# Altium PCB RT5621 Main V3.3.PcbDoc (part 1 of 2)
Units mm, origin at the board's own origin, x right, y up, seen from the top; angles counter-clockwise.
Board outline 104 x 70 mm, 2 copper layers (Top Layer, Bottom Layer); 129 components, 94 nets, 375 pads, 418 vias.
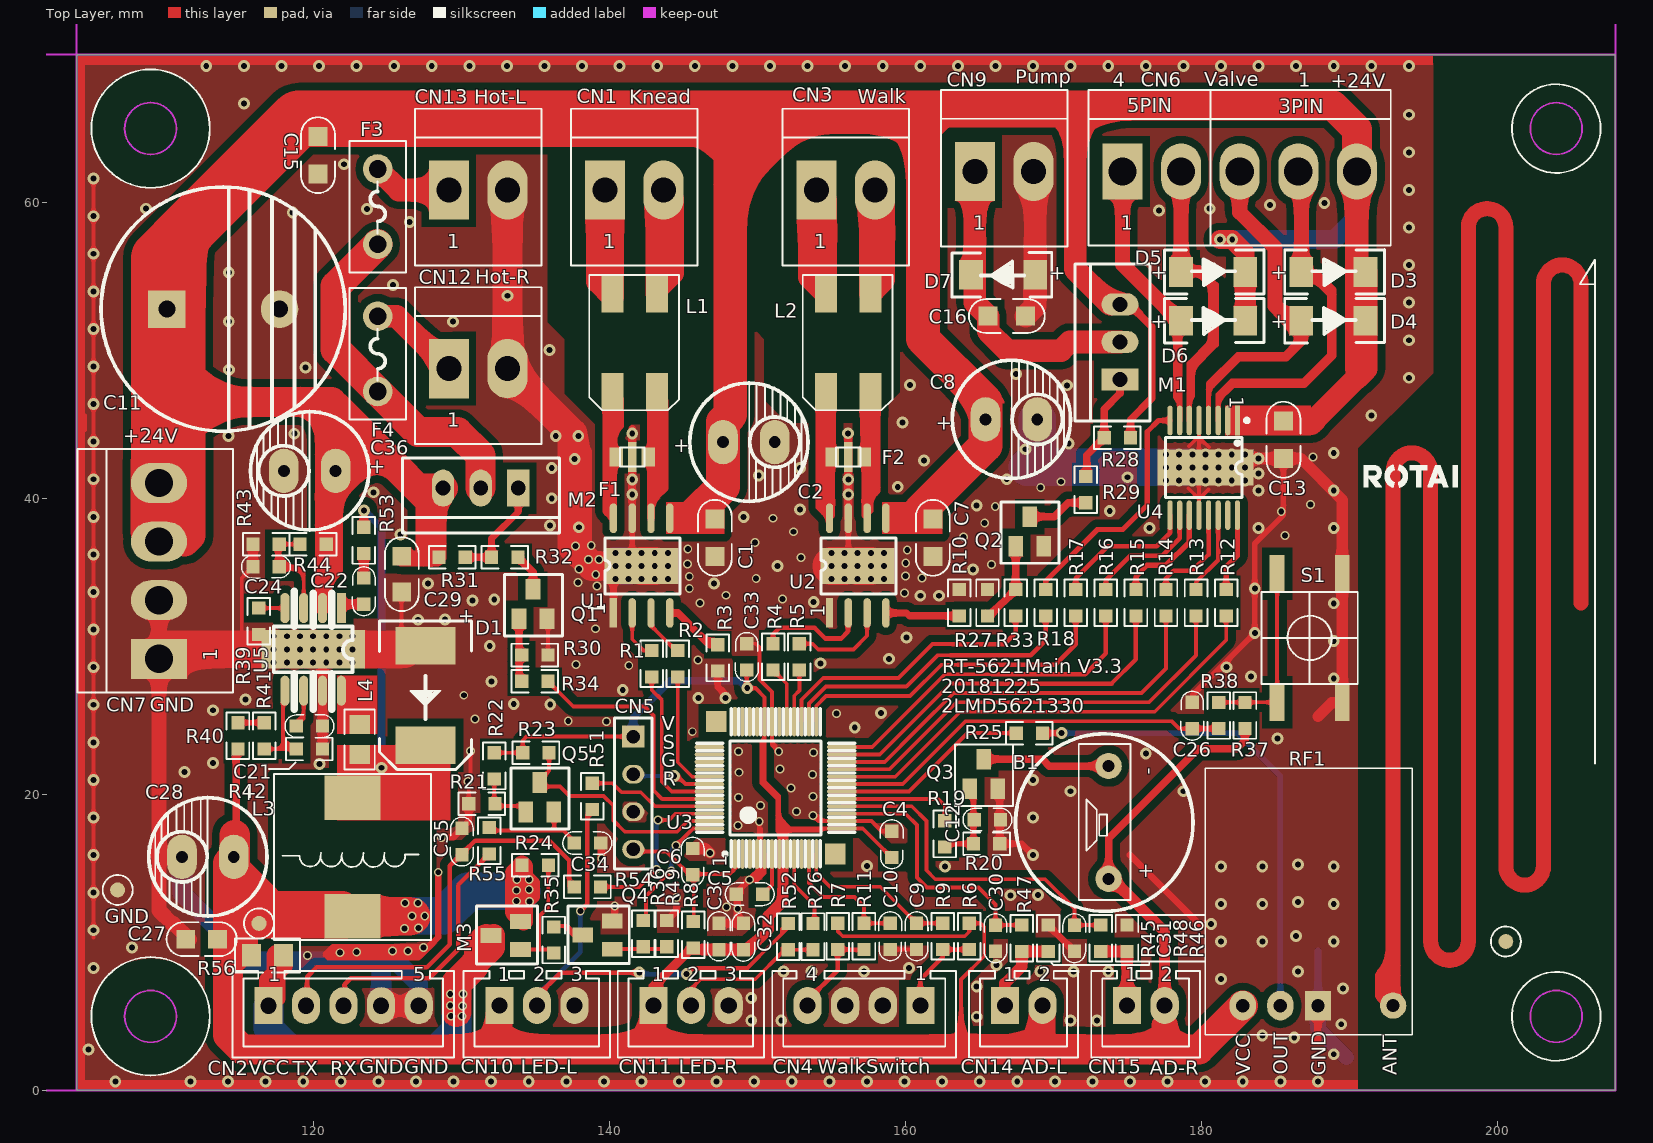
[diagram p0: Top Layer view]
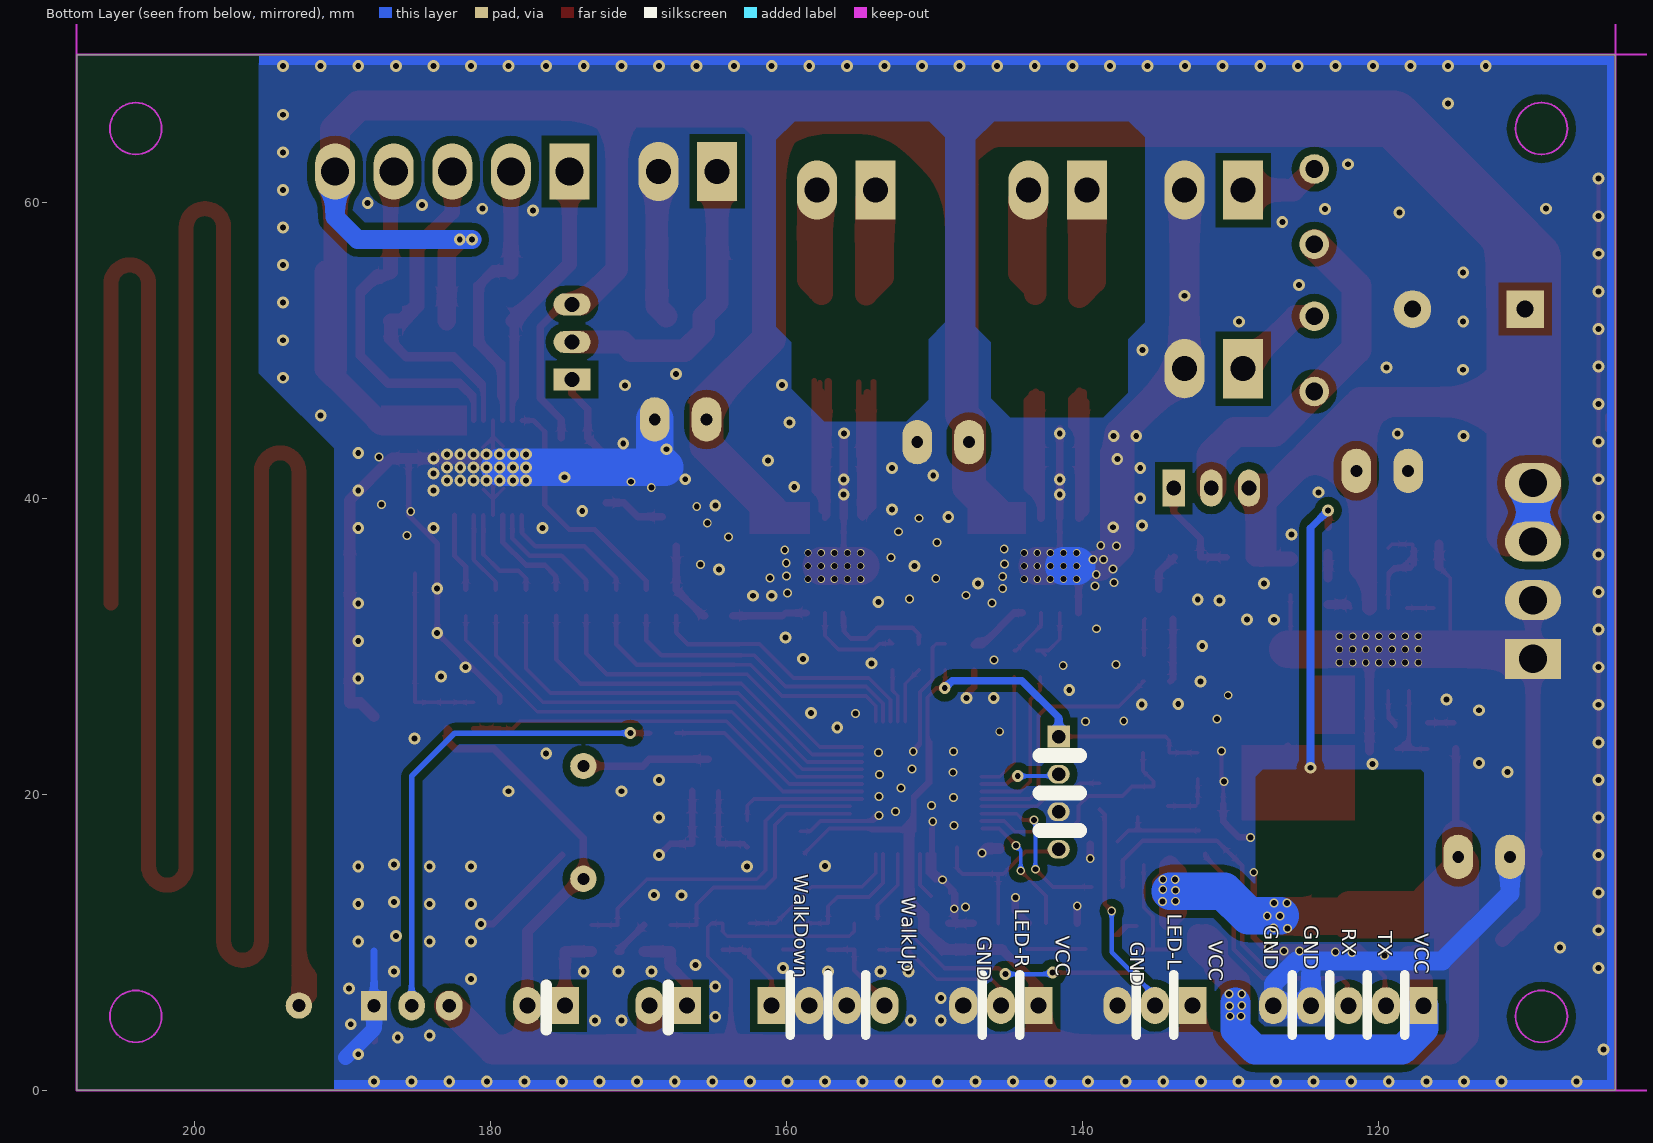
[diagram p1: Bottom Layer view, seen from below]

## Layer stack, top to bottom
Top Solder: solder mask 0.0102, Solder Resist, Dk 3.5
Top Layer: signal copper 0.0356
Dielectric1: dielectric 0.32, FR-4, Dk 4.8
Bottom Layer: signal copper 0.0356
Bottom Solder: solder mask 0.0102, Solder Resist, Dk 3.5

## Board outline
104,0 208,0 208,70 104,70

## Design rules (kind name [scope] priority, off if disabled: settings)
Clearance [InPolygon] p1: gap=0.508
Clearance Clearance_1 [All] p2: gap=0.254
ComponentClearance [All] p1: gap=0.127 collisioncheckmode=3 verticalgap=0.127 showdistances=FALSE
FabricationTestPointUsage TestPointUsage [All] p1: valid=0 allowmultiple=FALSE
FabricationTestpoint Testpoint [All] p1: side=3 testpointundercomponent=TRUE minsize=1.016 maxsize=2.54 preferedsize=1.524 minholesize=0 maxholesize=1.016 preferedholesize=0.813 testpointgrid=0.025 allowsidetop=TRUE allowsidebottom=TRUE usegrid=TRUE gridtolerance=0
HoleSize [All] p1: absolutevalues=TRUE maxlimit=5.08 minlimit=0.025 maxpercent=80.000 minpercent=20.000
HoleToHoleClearance [All] p1 off: gap=0.254 allowstackedmicrovias=TRUE
MinimumSolderMaskSliver [All] p1 off: minsoldermaskwidth=0.254
PlaneConnect [All] p1: planeconnectstyle=Direct reliefexpansion=0.508 reliefentries=4 reliefconductorwidth=0.254 reliefairgap=0.254
PolygonConnect [All] p1: connectstyle=Direct reliefconductorwidth=0.254 reliefentries=4 polygonreliefangle="90 Angle" airgapwidth=0.254
RoutingVias [All] p1: holewidth=0.4 width=0.8 viastyle="Through Hole" minholewidth=0.229 minwidth=0.457 maxholewidth=0.6 maxwidth=1.27
SilkToSilkClearance [All] p1 off: silktosilkclearance=0.025
SilkToSolderMaskClearance SilkscreenOverComponentPads [IsPad] p1 off: minsilkscreentomaskgap=0.254 clearancetoexposedcopper=TRUE
SolderMaskExpansion [All] p1: expansion=0.102
UnpouredPolygon [All] p1: allowunpoured=FALSE
Width [All] p1: maxlimit=5.08 minlimit=0.127 preferedwidth=5.08
20 further rules are at their usual default settings.

## Classes and differential pairs
component class "RT5621 Main V3.2": B1 C3 C4 C5 C6 C9 C10 C11 C12 C15 C26 C32 C33 C34 C35 C36 CN2 CN4 CN5 CN7 CN10 CN11 Q3 Q5 R6 R7 R8 R9 R11 R19 R20 R21 R22 R23 R25 R26 R37 R38 R51 R52 R54 R55 RF1 S1 U3

## Components (designator, comment, footprint, x,y, rotation, side; value= is the part's Value field where it differs from the comment)
B1 "BUZZWR" BUZZER 173.748,14.298 r90 top
C1 "100nF/0805" 0805C#1 147.139,36.074 r90 top
C2 "100UF/50V" RB.15/.35 147.688,43.807 r0 top
C3 "10nF/0603" 0603C 147.416,11.284 r270 top
C4 "10nF/0603" 0603C 159.093,17.518 r270 top
C5 "1uF/0603" 0603C 150.368,13.259 r180 top
C6 "100nF/0603" 0603C 145.638,16.338 r270 top
C7 "100nF/0805" 0805C#1 161.871,36.074 r90 top
C8 "100uF/50V" RB.15/.35 165.427,45.345 r0 top
C9 "100nF/0603" 0603C 160.769,11.295 r270 top
C10 "100nF/0603" 0603C 158.991,11.295 r270 top
C11 "1000uF/50V" CD16-7.5MM 110.096,52.798 r180 top
C12 "1nF/0603" 0603C 166.441,18.294 r180 top
C13 "100nF/0805" 0805C#1 185.562,42.7 r90 top
C15 "100nF/0805" 0805C#1 120.314,61.931 r90 top
C16 "100nF/0805" 0805C#1 168.14,52.33 r180 top
C21 "22nF/0603" 0603C 120.619,24.619 r180 top
C22 "100nF/50V" 0603C 123.413,32.848 r90 top
C24 "100nF/0603" 0603C 115.92,35.388 r0 top
C26 "100nF/0603" 0603C 179.405,24.444 r90 top
C27 "100nF/0805" 0805C#2 111.373,10.217 r0 top
C28 "470uF/16V/8*12" RB.15/.35 114.625,15.779 r180 top
C29 "10nF/0805" 0805C#3 125.978,36.099 r270 top
C30 "100nF/0603" 0603C 166.103,11.168 r270 top
C31 "100nF/0603" 0603C 171.437,11.168 r270 top
C32 "100nF/0603" 0603C 149.067,9.506 r90 top
C33 "100nF/0603" 0603C 149.294,28.407 r90 top
C34 "33pF/0603" 0603C 137.643,16.713 r0 top
C35 "33pF/0603" 0603C 130.042,15.932 r90 top
C36 "100uF/50V" RB.15/.35 121.508,41.865 r180 top
CN1 "BACK蓝" CON-VH-2P 139.704,60.839 r0 top
CN2 "XH-5A白" CON-XA-5P 116.961,5.721 r0 top
CN3 "VH-2A黑" CON-VH-2P 153.997,60.839 r0 top
CN4 "WalkSwitch白" CON-XA-4P 161.027,5.727 r180 top
CN5 "4A" SIP4 141.625,23.907 r270 top
CN6 "VH-5A白" CON-VH-5P 174.688,62.095 r0 top
CN7 "VH-4A白" CON-VH-4P 109.57,29.165 r90 top
CN9 "PUMP白" CON-VH-2P 164.713,62.109 r0 top
CN10 "XH-3A白" CON-XA-3P 132.579,5.727 r0 top
CN11 "XH-3A白" CON-XA-3P 142.993,5.727 r0 top
CN12 "VH-2A红" CON-VH-2P 129.163,48.774 r0 top
CN13 "VH-2A红" CON-VH-2P 129.163,60.839 r0 top
CN14 "HA-2A红" CON-XA-2P 166.742,5.727 r0 top
CN15 "HA-2A红" CON-XA-2P 174.997,5.727 r0 top
D1 "MBRS540T3G" DO-214AB 127.579,30.054 r270 top
D3 "4007" DO-214AC 186.771,55.305 r0 top
D4 "4007" DO-214AC 186.771,52.003 r0 top
D5 "4007" DO-214AC 178.643,55.305 r0 top
D6 "4007" DO-214AC 178.643,52.003 r0 top
D7 "4007" DO-214AC 168.787,55.124 r180 top
F1 "101/X2Y" X2Y 141.551,42.805 r0 top
F2 "101/X2Y" X2Y 156.156,42.805 r0 top
F3 "PTCKT30-1350B-F" FRAD0.2 124.349,62.267 r270 top
F4 "PTCKT30-1350B-F" FRAD0.2 124.349,52.311 r270 top
L1 "ACM7060" TLDCM7161 141.719,50.53 r90 top
L2 "ACM7060" TLDCM7161 156.146,50.53 r90 top
L3 "6.8uH-5.2A" LH-11*11 122.651,19.767 r270 top
L4 "L60R5A" 0805L 123.134,24.72 r270 top
M1 "IRF9530" TO-220AB 174.518,48.037 r90 top
M2 "IRF9530" TO-220AB 133.849,40.703 r180 top
M3 "CES2305/P-MOS" SOT-23C 132.004,10.465 r90 top
Q1 "MMBT3904" SOT-23-N 134.849,33.868 r0 top
Q2 "MMBT3904" SOT-23-N 168.418,38.772 r0 top
Q3 "SS8050" SOT-23 164.358,20.377 r0 top
Q4 "MMBT3904" SOT-23B 138.201,10.49 r90 top
Q5 "MMBT3904" SOT-23B 135.3,20.809 r0 top
R1 "1kΩ/0603" 0603 142.869,27.946 r90 top
R2 "1kΩ/0603" 0603 144.624,27.946 r90 top
R3 "21.5KΩ/0805" 0603 147.336,28.333 r90 top
R4 "1kΩ/0603" 0603 151.072,28.407 r90 top
R5 "1kΩ/0603" 0603 152.85,28.407 r90 top
R6 "33K/0603" 0603 164.325,9.517 r90 top
R7 "33K/0603" 0603 155.435,9.517 r90 top
R8 "4.7K/0603" 0603 145.669,11.405 r270 top
R9 "1kΩ/0603" 0603 162.547,9.517 r90 top
R10 "21.5KΩ/0805" 0603 163.657,33.842 r270 top
R11 "1kΩ/0603" 0603 157.213,9.517 r90 top
R12 "1kΩ/0603" 0603 181.691,32.064 r90 top
R13 "1kΩ/0603" 0603 179.659,32.064 r90 top
R14 "1kΩ/0603" 0603 177.627,32.064 r90 top
R15 "1kΩ/0603" 0603 175.595,32.064 r90 top
R16 "1kΩ/0603" 0603 173.563,32.064 r90 top
R17 "1kΩ/0603" 0603 171.531,32.064 r90 top
R18 "1kΩ/0603" 0603 169.499,33.842 r270 top
R19 "1kΩ/0603" 0603 162.681,18.218 r270 top
R20 "33K/0603" 0603 166.39,16.668 r180 top
R21 "33KΩ/0603/5%" 0603 132.278,19.361 r180 top
R22 "33KΩ/0603/5%" 0603 132.227,22.815 r270 top
R23 "33KΩ/0603/5%" 0603 135.935,22.815 r180 top
R24 "10kΩ(5%)/0603" 0603 135.884,15.221 r180 top
R25 "1kΩ/0603" 0603 169.282,24.142 r180 top
R26 "1kΩ/0603" 0603 153.766,9.506 r90 top
R27 "10kΩ(5%)/0603" 0603 165.562,33.842 r270 top
R28 "10kΩ(5%)/0603" 0603 173.451,44.1 r0 top
R29 "10kΩ(5%)/0603" 0603 172.203,41.49 r270 top
R30 "10kΩ(5%)/0603" 0603 135.859,29.419 r180 top
R31 "10kΩ(5%)/0603" 0603 130.271,36.023 r180 top
R32 "10kΩ(5%)/0603" 0603 132.049,36.023 r0 top
R33 "4.7K/0603" 0603 167.467,32.064 r90 top
R34 "4.7K/0603" 0603 135.859,27.641 r180 top
R35 "100Ω/0603/5%" 0603 136.246,11.049 r270 top
R36 "1KΩ/0603/5%" 0603 142.291,11.481 r270 top
R37 "10kΩ(5%)/0603" 0603 182.961,26.222 r270 top
R38 "1kΩ/0603" 0603 181.183,26.222 r270 top
R39 "100kΩ/0603" 0603 116.301,32.594 r270 top
R40 "51kΩ(1%)/0603" 0603 114.904,24.847 r270 top
R41 "5.1kΩ(1%)/0603" 0603 116.682,23.069 r90 top
R42 "10kΩ(1%)/0603" 0603 120.619,23.069 r180 top
R43 "10kΩ(5%)/0603" 0603 115.92,36.912 r0 top
R44 "47KΩ/0603" 0603 119.095,36.912 r0 top
R45 "10kΩ(1%)/0603" 0603 169.659,11.168 r270 top
R46 "10kΩ(1%)/0603" 0603 174.993,11.168 r270 top
R47 "4.7K/0603" 0603 167.881,11.168 r270 top
R48 "4.7K/0603" 0603 173.215,11.168 r270 top
R49 "10kΩ(5%)/0603" 0603 143.891,11.481 r270 top
R51 "1kΩ/0603" 0603 138.856,18.98 r90 top
R52 "0Ω" 0603 152.095,9.5 r90 top
R53 "0Ω" 0603 123.413,38.055 r270 top
R54 "10Ω/0603/5%" 0603 137.637,13.747 r0 top
R55 "1KΩ/0603/5%" 0603 131.897,15.983 r90 top
R56 "1KΩ/0603/5%" 0805 115.824,9.119 r0 top (schematic designator R55)
RF1 "SYN480-V2.0" SYN480R-V2.0 182.816,5.727 r0 top
S1 "SMT-4.3" SMT-SWITCH4.3 187.337,30.573 r270 top
U1 "IC-DRV8871" DRV8871 140.281,32.264 r90 top
U2 "IC-DRV8871" DRV8871 154.886,32.264 r90 top
U3 "STM8S105C4T6" LQFP-48 148.497,15.972 r90 top
U4 "DRV8803" PWP16 182.453,45.272 r270 top
U5 "IC-LMR14030" SO-8-2 119.984,29.8 r270 top
? "Comment" LOGO 190.926,40.798 r0 top

## Footprints (in the part's own frame and the unit in brackets; to place one, negate y for a bottom-side part, rotate by r counter-clockwise, add the part's x,y. Pads: shape width x height; smd on the part's side, far side on the other; paste and mask are expansions set on the pad)
0603 [mil]
  rect 35x35.43 smd: 1(0,0) 2(70,0)
  silkscreen extent -27,-30 97,30
0603C [mm]
  rect 0.9x0.9 smd: 1(0,0) 2(1.778,0)
  silkscreen extent -0.77,-0.77 2.53,0.77
0805 [mil]
  rect 50x60 smd: 1(0,0) 2(85,0)
  silkscreen extent -44,-45 129,45, body extent -3,-27 87,27, height 30
0805C#1 [mm]
  rect 1.27x1.27 smd: 1(0,0) 2(2.54,0)
  silkscreen extent -1.3,-1.14 3.84,1.14
0805C#2 [mm]
  rect 1.27x1.27 smd: 1(0,0) 2(2.159,0)
  silkscreen extent -1.3,-1.14 3.45,1.14, body extent 0.07,-0.62 2.07,0.63, height 0.78
0805C#3 [mm]
  rect 1.27x1.27 smd: 1(0,0) 2(2.413,0)
  silkscreen extent -1.3,-1.14 3.71,1.14
0805L [mil]
  rect 50x55 smd: 1(0,0) 2(80,0)
  silkscreen extent -40,-40 120,40, body extent 1,-24 79,24, height 32
BUZZER [mil]
  round 70 hole 32: 1(0,0) 2(300,0)
  silkscreen extent -87,-225 386,248
CD16-7.5MM [mil]
  rect 100x100 hole 45: 1(0,0)
  round 100 hole 45: 2(-300,0)
  silkscreen extent -475,-325 175,325
CON-VH-2P [mm]
  rect 2.7x4 hole 1.7: 1(0,0)
  oval 2.7x4 hole 1.7: 2(3.96,0)
  silkscreen extent -2.29,-5.08 6.25,5.5
CON-VH-4P [mm]
  rect 2.7x3.8 hole 1.9: 1(0,0)
  oval 2.7x3.8 hole 1.9: 2(3.96,0) 3(7.92,0) 4(11.88,0)
  silkscreen extent -2.29,-5 14.17,5.5, body extent -1.94,-4.8 13.84,3.7, height 10.9
CON-VH-5P [mm]
  rect 2.7x3.8 hole 1.9: 1(0,0)
  oval 2.7x3.8 hole 1.9: 2(3.96,0) 3(7.92,0) 4(11.88,0) 5(15.84,0)
  silkscreen extent -2.29,-5 18.13,5.5
CON-XA-2P [mm]
  rect 1.905x2.5 hole 1.092: 1(0,0)
  oval 1.905x2.5 hole 1.092: 2(2.54,0)
  silkscreen extent -2.42,-3.5 4.93,2.35
CON-XA-3P [mm]
  rect 1.905x2.5 hole 1.092: 1(0,0)
  oval 1.905x2.5 hole 1.092: 2(2.54,0) 3(5.08,0)
  silkscreen extent -2.42,-3.5 7.47,2.35
CON-XA-4P [mm]
  rect 1.905x2.5 hole 1.092: 1(0,0)
  oval 1.905x2.5 hole 1.092: 2(2.54,0) 3(5.08,0) 4(7.62,0)
  silkscreen extent -2.42,-2.35 10.01,3.5
CON-XA-5P [mm]
  rect 1.905x2.5 hole 1.092: 1(0,0)
  oval 1.905x2.5 hole 1.092: 2(2.54,0) 3(5.08,0) 4(7.62,0) 5(10.16,0)
  silkscreen extent -2.42,-3.5 12.55,2.35
DO-214AB [mil]
  rect 100x160 smd: 1(0,0) 2(265,0)
  silkscreen extent -65,-122 330,122
DO-214AC [mm]
  rect 1.6x2 smd: 1(0,0) 2(4.34,0)
  silkscreen extent -1.12,-1.5 5.61,1.52
DRV8871 [mm]
  rect 2x0.5 smd: 1(0,0)
  oval 2x0.5 smd: 2(0,-1.27) 3(0,-2.54) 4(0,-3.81) 5(6.4,-3.81) 6(6.4,-2.54) 7(6.4,-1.27) 8(6.4,0)
  rect 2.46x5 smd: 7(3.175,-1.905)
  silkscreen extent 1.27,-4.49 5.08,0.58, body extent 0.3,-4.35 6.3,0.55, height 1.75
FRAD0.2 [mm]
  round 2 hole 1.2: 1(0,0) 2(5.08,0)
  silkscreen extent -1.9,-1.91 6.99,1.9
LH-11*11 [mm]
  rect 3x3.8 smd: 1(0,0) 2(8,0)
  silkscreen extent -1.6,-5.3 9.6,5.3
LOGO [mm]
  silkscreen extent 0.06,-0.03 6.41,1.48
LQFP-48 [mm] "Thin QFP, 48-Leads, Body 7x7mm, Pitch 0.5mm, IPC High Density"
  rect 1.397x1.397 smd: 0(0,-6.775) 0(8.95,1.275)
  oval 2x0.27 smd: 1(0,0) 2(0,-0.5) 3(0,-1) 4(0,-1.5) 5(0,-2) 6(0,-2.5) 7(0,-3) 8(0,-3.5) 9(0,-4) 10(0,-4.5) 11(0,-5) 12(0,-5.5) 25(8.95,-5.5) 26(8.95,-5) 27(8.95,-4.5) 28(8.95,-4) 29(8.95,-3.5) 30(8.95,-3) 31(8.95,-2.5) 32(8.95,-2) 33(8.95,-1.5) 34(8.95,-1) 35(8.95,-0.5) 36(8.95,0)
  oval 0.27x2 smd: 13(1.725,-7.225) 14(2.225,-7.225) 15(2.725,-7.225) 16(3.225,-7.225) 17(3.725,-7.225) 18(4.225,-7.225) 19(4.725,-7.225) 20(5.225,-7.225) 21(5.725,-7.225) 22(6.225,-7.225) 23(6.725,-7.225) 24(7.225,-7.225) 37(7.225,1.725) 38(6.725,1.725) 39(6.225,1.725) 40(5.725,1.725) 41(5.225,1.725) 42(4.725,1.725) 43(4.225,1.725) 44(3.725,1.725) 45(3.225,1.725) 46(2.725,1.725) 47(2.225,1.725) 48(1.725,1.725)
  silkscreen extent -0.88,-8.1 9.83,2.6
PWP16 [mm]
  rect 2x0.35 smd: 1(0,0)
  oval 2x0.35 smd: 2(0,-0.65) 3(0,-1.3) 4(0,-1.95) 5(0,-2.6) 6(0,-3.25) 7(0,-3.9) 8(0,-4.55) 9(6.4,-4.55) 10(6.4,-3.9) 11(6.4,-3.25) 12(6.4,-2.6) 13(6.4,-1.95) 14(6.4,-1.3) 15(6.4,-0.65) 16(6.4,0)
  rect 2.46x6.5 smd: 12(3.175,-2.159)
  silkscreen extent -0.13,-4.86 5.21,0.76
RB.15/.35 [mm]
  oval 2x3 hole 0.8: 1(0,0) 2(3.5,0)
  silkscreen extent -2.25,-4.09 5.75,4
SIP4 [mm]
  rect 1.5x1.5 hole 0.9: 1(0,0)
  oval 1.27x1.5 hole 0.9: 2(2.54,0) 3(5.08,0) 4(7.62,0)
  silkscreen extent -1.27,-1.27 8.94,1.27
SMT-SWITCH4.3 [mm]
  rect 2.5x1 smd: 1(-4.35,2.2) 1(4.35,2.2) 2(-4.35,-2.2) 2(4.35,-2.2)
  silkscreen extent -3.1,-3.25 3.1,3.25
SO-8-2 [mil]
  rect 80x24 smd: 1(-110,75)
  oval 80x24 smd: 2(-110,25) 3(-110,-25) 4(-110,-75) 5(110,-75) 6(110,-25) 7(110,25) 8(110,75)
  rect 102.36x275.59 smd: 9(0,0)
  silkscreen extent -155,-105 159,105, body extent -123,-99 115,99, height 63
SOT-23 [mm]
  rect 1x1.4 smd: B(0,0) C(0.95,2) E(1.9,0)
  silkscreen extent -0.98,-1.15 2.93,2.99
SOT-23-N [mm]
  rect 1x1.4 smd: B(-0.95,-2) C(0,0) E(0.95,-2)
  silkscreen extent -1.93,-3.15 1.98,0.99, body extent -1.51,-2.18 1.49,0.36
SOT-23B [mm]
  rect 1x1.4 smd: B(-0.95,-2) C(0,0) E(0.95,-2)
  silkscreen extent -1.93,-3.15 1.98,0.99, body extent -1.5,-2.34 1.5,0.16, height 1.05
SOT-23C [mm]
  rect 1x1.4 smd: D(0,0) G(-0.95,-2) S(0.95,-2)
  silkscreen extent -1.93,-3.15 1.98,0.99, body extent -1.5,-2.34 1.5,0.16, height 1.05
SYN480R-V2.0 [mm]
  rect 1.778x2 hole 0.9: 1(5.08,0)
  oval 1.778x2 hole 0.9: 2(2.54,0) 3(0,0)
  round 1.778 hole 0.889: 4(10.16,0)
  silkscreen extent -2.55,-1.96 11.45,16.04
TLDCM7161 [mm]
  rect 2.5x1.5 smd: 1(-3.3,-1.5) 2(-3.3,1.5) 3(3.3,1.5) 4(3.3,-1.5)
  silkscreen extent -4.57,-3 4.57,3.07
TO-220AB [mm]
  rect 1.5x2.5 hole 1: 1(0,0)
  oval 1.5x2.5 hole 1: 2(2.54,0) 3(5.08,0)
  silkscreen extent -2.79,-2.03 7.82,3.05, body extent -2.79,-2.02 7.88,2.81, height 22.76
X2Y [mm]
  rect 0.89x1.27 smd: 1(-1.08,0) 2(1.08,0)
  rect 0.55x2.03 smd: 3(0,0)
  silkscreen extent -0.83,-0.64 0.82,0.64

## Part data
B1: library part BUZZWR-5V
C1 C7 C13 C15 C16 C27: library part C0805/104M
C2 C8 C36: library part CD/100uF/50V
C3 C4: library part C0603/10nF
C5: library part C0603/105M
C6 C9 C10 C24 C26 C30 C31 C32 C33: library part C0603/100nF
C11: library part CD-1000uF/50V/16*26
C12: library part C0603/1nF
C21: library part C0603/22nF
C22: library part C0603/100nF/50V
C28: library part 电解电容470uF/16V/8*12/编带/环保
C29: library part C0805/103/50V
C34 C35: library part C0603/33PF
CN1: library part CON-VH-2A(蓝色)
CN2: library part CON-HA-5A(白色)
CN3: library part CON-VH-2A(黑色)
CN4: library part CON-HA-4A(白色)
CN5: library part CON-4A
CN6: library part CON-VH-5A(白色)
CN7: library part CON-VH-4A(白色)
CN9: library part CON-VH-2A(白色)
CN10 CN11: library part CON-HA-3A(白色)
CN12 CN13: library part CON-VH-2A(红色)
CN14 CN15: library part CON-HA-2A(红色)
D1: library part D-MBRS540T3G
D3 D4 D5 D6 D7: library part D4007/M7
F1 F2: library part CX2Y/101
F3 F4: library part F-PTCKT30-1350B-F/环保
L1 L2: library part L/ACM7060
L3: library part L-6.8uH-5.2A/10*10/环保
L4: library part L0603/60R5A
M1 M2: library part MP-IRF9530/环保
M3: library part P沟道mos管CES2305封装SOT-23/环保
Q1 Q2 Q4: library part Q-MMBT3904/1AM-N
Q3: library part Q-SS8050/SOYT-23封装/NPN/环保
Q5: library part 贴片三极管1AM/MMBT3904/sot-23封装环保
R1 R2 R4 R5 R9 R11 R12 R13 R14 R15 R16 R17 R18 R19 R25 R26 R38 R51: library part R0603/1kΩ
R3 R10: library part "R0603/21.5KΩ 1%"
R6 R7 R20: library part R0603/33K
R8 R33 R34 R47 R48: library part R0603/4.7K/(5%)
R21 R22 R23: library part 贴片电阻33K/(5%)/0603封装/环保
R24 R27 R28 R29 R30 R31 R32 R37 R43 R49: library part R0603/10kΩ/(5%)
R35: library part 贴片电阻100Ω/(5%)0603封装
R36 R55 R56: library part 贴片电阻1K/(5%)/0603封装/环保
R39: library part R0603/100K
R40: library part R0603/51kΩ(1%)
R41: library part R0603/5.1kΩ(1%)
R42 R45 R46: library part R0603/10kΩ(1%)
R44: library part R0603/47KΩ
R52 R53: library part R0603/0Ω
R54: library part 贴片电阻10Ω/精度5%/0603封装/环保
RF1: library part RF-315/433MH-V2.0
S1: library part SW-SMT-4.3mm
U3: library part IC-MCU-STM8S105C4T6
U4: library part IC-DRV8803
U5: library part IC-LMR14030/SO-8

## Free pads (board coordinates)
  round 1.016 smd: 0(106.776,13.544) 0(116.326,11.284)
  round 1 smd: 8(200.596,10.061)

## Via types
v1: diameter 0.8, hole 0.4, Top Layer to Bottom Layer, tented both sides, 268 vias
v2: diameter 0.6, hole 0.4, Top Layer to Bottom Layer, tented both sides, 99 vias
v3: diameter 0.5, hole 0.4, Top Layer to Bottom Layer, tented both sides, 51 vias

## Nets (pads, with @x,y where several pads share a name; then routed paths per layer and width w, separated by ;. In a path a pad name is that pad's centre, name@x,y a point inside that pad or via, vN(x,y) a via of type N, cw(c..) or ccw(c..) an arc to the next point about the centre after c; other vN are vias at no path point)
AD1: C30.1 R47.1 U3.15 | length 18.2
  Top Layer w0.254: U3.15@155.722,18.697 160.027,18.697 160.798,17.926 160.798,14.386 161.477,13.708 164.96,13.708 166.103,12.565 C30.1@166.103,11.168 R47.1@167.881,11.168
AD2: C31.1 R48.1 U3.16 | length 23.4
  Top Layer w0.254: U3.16@155.722,19.197 160.442,19.197 161.433,18.205 161.433,15.914 161.433,14.868 162.035,14.266 169.456,14.266 171.437,12.285 C31.1@171.437,11.168 R48.1@173.215,11.168
AIRPUMP1: R33.1 U3.27 | length 19
  Top Layer w0.254: U3.27@152.997,24.922 152.997,26.4 154.466,27.87 159.548,27.87 161.837,30.159 163.186,30.159
  Top Layer w0.305: 163.186,30.159 166.705,30.159 167.467,30.921 R33.1@167.467,32.064
ANT: RF1.4 | length 244
  Top Layer w1.016: RF1.4@192.976,5.727 192.262,6.441 192.262,7.03 ; RF1.4@192.976,6.215 192.976,7.745 ; 205.676,32.921 205.676,54.511 ccw(c204.406,54.511) 204.406,55.781 ccw(c204.406,54.511) 203.136,54.511 203.136,15.141 cw(c201.866,15.141) 201.866,13.871 cw(c201.866,15.141) 200.596,15.141 200.596,58.321 ccw(c199.326,58.321) 199.326,59.591 ccw(c199.326,58.321) 198.056,58.321 198.056,10.061 cw(c196.786,10.061) 196.786,8.791 cw(c196.786,10.061) 195.516,10.061 195.516,41.811 ccw(c194.246,41.811) 194.246,43.081 ccw(c194.246,41.811) 192.976,41.811 192.976,8.456 ; 192.262,7.03 192.976,7.745 ; 192.262,7.03 192.262,7.742 192.976,8.456 ; 192.976,7.745 192.976,8.456
BACKKNEADANTICLOCK: R5.1 U3.28 | length 3.6
  Top Layer w0.254: U3.28@152.497,24.922 152.497,26.662 152.85,27.016 R5.1@152.85,28.407
BACKKNEADCLOCK: R4.1 U3.29 | length 3.9
  Top Layer w0.254: R4.1@151.072,28.407 151.997,27.483 U3.29@151.997,24.922
DC24V: C1.2 C2.1 C7.2 C8.1 C11.1 C13.2 C15.2 C29.1 C36.1 CN6.5 CN7.3 CN7.4 D3.2 D4.2 D5.2 D6.2 M1.3 M2.3 R28.2 R31.2 R44.2 U1.5 U2.5 U4.1 U4.2 U5.2 | length 417.1
  Top Layer w0.508: M1.3@173.857,53.117 M1.3@174.518,53.117 175.178,53.117 176.677,51.619 176.677,46.767 175.229,45.32 R28.2@175.229,44.1
  Top Layer w1.016: 119.12,46.519 120.619,45.021 ; U5.2@120.619,32.594 120.619,34.321 ; 120.619,45.913 120.619,45.021 ; 121.225,46.519 121.508,46.237 121.508,44.354 ; 123.262,44.483 123.134,44.354 121.508,44.354 ; 123.718,42.322 123.54,42.145 ; 123.946,43.465 121.508,43.465 ; 124.81,42.935 124.787,42.957 C36.1@121.508,42.957 ; 125.6,42.145 123.54,42.145 ; C29.1@125.953,35.896 127.426,35.896 ; M2.3@128.468,40.401 128.493,40.376 128.493,36.963 ; 120.619,34.321 120.619,38.182 ; 120.619,34.321 121.508,35.21 121.508,39.071 ; 120.619,38.182 C36.1@120.619,42.145 ; 120.619,38.182 121.508,39.071 ; C36.1@120.619,42.145 120.619,42.957 ; C36.1@120.619,42.145 C36.1@121.508,42.145 ; 120.619,42.957 120.619,45.021 ; 120.619,42.957 C36.1@121.508,42.957 ; 121.508,39.071 121.508,40.113 ; 121.508,40.113 123.54,42.145 ; 121.508,40.113 C36.1@121.508,41.865 C36.1@121.508,42.145 ; C36.1@121.508,42.145 C36.1@121.508,42.957 ; C36.1@121.508,42.145 123.54,42.145 ; C36.1@121.508,42.957 121.508,43.465 ; 121.508,43.465 121.508,44.354 ; 127.426,35.896 128.366,35.896 R31.2@128.493,36.023 128.493,36.963 ; 127.426,35.896 127.909,36.379 128.493,36.963
  Top Layer w1.27: v1(181.283,57.496) v1(182.105,57.496) 182.983,56.618 D5.2@182.983,55.305 D6.2@182.983,52.003
  Top Layer w1.524: 162.288,65.83 170.517,65.83 171.495,64.852 ; 173.197,66.554 171.495,64.852 ; M1.3@173.857,53.117 171.495,55.48 171.495,64.852 ; 187.626,45.272 190.528,48.174
  Top Layer w1.6: 182.643,45.083 187.436,45.083 187.626,45.272 ; 190.528,48.174 191.111,48.757 D4.2@191.111,52.003 D3.2@191.111,55.305 ; 190.528,48.758 CN6.5@190.528,62.095
  Top Layer w2: 127.042,40.703 M2.3@128.769,40.703
  Top Layer w2.032: CN7.3@109.545,37.822 111.292,37.085 111.704,37.496 111.704,44.821 113.402,46.519 ; 109.57,43.491 112.599,46.519 ; 109.57,46.742 109.793,46.519 112.599,46.519 ; 111.579,48.342 113.402,46.519 ; 121.225,46.519 119.12,46.519 113.402,46.519 ; 121.508,46.237 123.262,44.483 124.787,42.957 ; 122.628,65.665 123.517,66.554 173.197,66.554 188.922,66.554 190.528,64.948 CN6.5@190.528,62.095 ; 124.81,42.935 125.6,42.145 127.042,40.703 127.909,39.836 127.909,36.379 ; 150.878,65.665 152.648,65.665 159.659,65.665 161.64,65.665 ; 161.205,64.747 162.288,65.83 ; 112.599,46.519 113.402,46.519
  Top Layer w2.286: 111.579,48.342 111.579,58.241 ; 145.742,38.868 147.688,40.814 C2.1@147.688,43.807 147.688,45.168 148.178,45.658 148.178,61.195 ; 145.917,65.665 148.178,63.404 148.178,62.965 ; 150.878,65.665 148.178,62.965 ; 152.648,65.665 148.178,61.195 ; 159.659,65.665 161.205,64.119 ; 160.982,39.122 165.427,43.567 C8.1@165.427,45.345 165.427,46.57 161.205,50.792 161.205,64.119 ; 161.205,64.747 161.205,64.119 ; 148.178,61.195 148.178,62.965
  Top Layer w3.81: CN7.3@109.545,37.822 109.545,41.782 109.57,43.491 109.57,46.742 109.57,56.232 111.579,58.241 119.003,65.665 122.628,65.665 145.917,65.665 150.878,65.665
  Bottom Layer w1.27: v1(181.283,57.496) 189.008,57.496 190.528,59.016 CN6.5@190.528,62.095
  Bottom Layer w2.032: CN7.3@109.57,37.085 CN7.4@109.57,41.045
GND: C1.1 C2.2 C3.1 C4.1 C5.2 C6.1 C7.1 C8.2 C9.2 C10.2 C11.2 C12.1 C13.1 C15.1 C16.1 C21.1 C24.1 C26.2 C27.1 C28.2 C29.2 C30.2 C31.2 C32.2 C33.2 C34.2 C35.2 C36.2 CN2.4 CN2.5 CN4.2 CN4.3 CN5.3 CN7.1 CN7.2 CN9.2 CN10.3 CN11.3 CN12.2 CN13.2 D1.1 D7.1 F1.3 F2.3 pad.0@106.776,13.544 Q1.E Q2.E Q3.E Q4.E R3.1 R10.1 R20.1 R21.2 R27.1 R30.1 R39.2 R42.1 R43.1 R45.1 R46.1 R49.1 RF1.1 S1.1 U1.1 U1.7 U2.1 U2.7 U3.4 U3.5 U3.14 U3.31 U4.5 U4.12 U5.7 U5.9 | length 388.9
  Top Layer w0.254: 104.583,44.625 104.583,45.607 ; 105.143,10.31 v1(105.143,53.998) v1(105.143,56.538) v1(105.143,59.078) v1(105.143,61.618) ; 115.793,29.8 115.158,30.435 115.158,34.626 C24.1@115.92,35.388 ; 116.301,29.8 R39.2@116.301,30.816 ; C29.2@125.953,33.483 125.953,30.181 D1.1@126.207,29.927 ; R21.2@130.5,19.361 130.5,20.834 130.627,20.961 v2(130.627,22.942) ; Q1.E@135.799,31.868 135.859,31.808 R30.1@135.859,29.419 ; C5.2@148.661,13.265 148.661,13.316 C5.2@148.991,13.646 ; C5.2@148.661,13.544 148.991,13.874 ; C5.2@148.991,13.341 C5.2@148.991,13.646 ; C33.2@149.294,30.185 149.902,30.185 150.156,29.931 150.156,27.771 151,26.927 ; 149.997,14.89 149.997,14.88 ; U3.4@149.997,15.972 149.997,14.88 ; 150.138,15.972 v2(150.138,18.175) v2@150.161,18.197 ; 150.185,14.535 149.997,14.535 ; U3.5@150.497,15.972 150.497,14.669 150.007,14.179 149.778,14.179 ; 150.997,23.552 150.997,23.532 ; 150.997,26.927 U3.31@150.997,24.922 150.997,23.532 ; 151.258,23.27 150.997,23.532 ; v2(151.455,22.891) 150.997,23.349 150.997,23.532 ; v2(153.766,18.573) 154.142,18.197 154.407,18.197 ; 154.068,18.536 154.407,18.197 ; 154.553,18.197 154.407,18.197 ; C10.2@158.991,9.517 160.261,9.517 ; C4.1@159.093,17.518 158.403,17.518 157.724,18.197 U3.14@155.722,18.197 154.407,18.197 ; 179.133,40.688 179.853,39.968 ; 179.184,43.533 179.853,44.202 ; U4.12@179.853,38.872 179.853,39.961 ; U4.5@179.853,45.272 179.853,44.202 ; 180.505,40.612 179.853,39.961 ; 180.53,43.457 179.853,44.134 ; C5.2@148.991,13.646 v2@149.524,14.179 ; C5.2@148.991,13.646 148.991,13.874 ; 148.991,13.874 v2@149.296,14.179 ; v2@149.296,14.179 v2@149.514,14.398 ; v2@149.296,14.179 v2@149.524,14.179 ; v2@149.514,14.398 149.997,14.398 ; v2@149.514,14.398 149.651,14.535 ; v2@149.524,14.179 149.778,14.179 ; 149.651,14.535 149.997,14.535 ; 149.651,14.535 149.997,14.88 ; 149.778,14.179 149.997,14.398 ; 149.997,14.398 149.997,14.535 ; 149.997,14.535 149.997,14.88 ; 179.853,39.961 179.853,39.968 ; 179.853,39.968 179.853,44.134 ; 179.853,44.134 179.853,44.202
  Top Layer w0.356: U1.7@141.551,36.328 U1.7@141.551,38.664 ; U2.7@156.156,36.328 U2.7@156.156,38.664
  Top Layer w0.381: v1(156.138,44.405) v1@156.156,44.387 ; F2.3@156.156,42.718 F2.3@156.237,42.799 ; C26.2@179.405,26.222 179.405,26.68 v1(183.629,30.903) 183.629,36.949 185.562,38.882 C13.1@185.562,42.7
  Top Layer w0.457: v2(128.442,14.738) 128.442,10.344 127.756,9.658 ; v2(128.671,17.1) 129.433,17.1 C35.2@130.042,17.71 130.5,18.167 R21.2@130.5,19.361 ; 136.625,45.191 137.507,44.309 138.605,43.211 v2@138.605,36.125 ; 139.29,35.439 v3(140.408,35.439) ; U1.1@140.281,32.264 U1.7@140.281,34.48 ; R3.1@147.336,28.333 147.336,27.266 147.848,26.755 v1(147.848,26.524) ; R20.1@166.39,16.665 167.876,16.665 v1(168.643,15.898) ; R20.1@166.39,16.668 Q3.E@166.39,20.245 ; R45.1@169.659,11.168 C31.2@171.437,9.39 C31.2@171.183,9.39 ; 175.185,15.903 179.844,11.244 v1(180.683,11.244) ; 120.962,9.29 127.083,9.29 ; 120.962,9.29 121.33,9.658 v2(127.452,9.658) ; 120.962,9.29 120.848,9.175 121.025,8.998 126.791,8.998 ; 126.791,8.998 127.096,8.998 127.756,9.658 ; 126.791,8.998 127.083,9.29 ; 127.083,9.29 v2(127.452,9.658) ; v2(127.452,9.658) 127.756,9.658
  Top Layer w0.508: v2(139.491,15.678) C34.2@139.491,16.618 ; Q4.E@140.374,11.294 v2(140.374,12.445) ; U1.7@141.551,38.664 v1@141.551,44.725 ; R49.1@143.682,11.284 144.551,12.153 v2(144.551,13.03) ; C3.1@147.416,11.284 C32.2@149.067,11.284 ; C32.2@148.661,11.69 C5.2@148.661,13.265 ; 187.896,3.365 RF1.1@187.896,6.215
  Top Layer w0.559: U2.7@156.156,38.664 F2.3@156.156,42.718 ; F2.3@156.156,42.805 v1@156.156,44.387
  Top Layer w0.61: C24.1@115.92,35.388 R43.1@115.92,36.912 ; R42.1@120.619,22.942 U5.7@120.619,27.006 U5.9@120.619,29.165
  Top Layer w0.762: C6.1@145.638,16.338 146.502,16.338 v2(146.806,16.033) ; v1(180.294,42.097) 180.897,42.7 C13.1@185.562,42.7 186.742,42.7 189.537,39.905 S1.1@189.537,34.923 S1.1@189.537,26.223 189.537,26.19 188.822,26.19 187.896,25.265
  Top Layer w1.016: CN7.2@109.57,33.125 CN7.1@109.57,29.165 109.57,16.033 109.57,12.147 110.459,11.258 110.561,11.258 C27.1@111.627,10.191
  Top Layer w1.27: 109.57,16.033 109.824,15.779 C28.2@111.125,15.779 ; CN2.4@124.581,5.721 CN2.5@127.121,5.721
  Top Layer w1.524: C16.1@168.14,52.33 168.787,52.977 D7.1@168.787,55.124 168.787,61.995 CN9.2@168.673,62.109
  Top Layer w2.032: CN13.2@133.123,60.839 CN12.2@133.123,48.774 137.507,44.391 137.507,44.309 137.507,36.766 138.833,35.439 139.29,35.439 ; v3(140.408,35.439) v3(141.297,35.439) v3(142.186,35.439)
  Top Layer w2.54: CN7.1@110.205,29.8 115.793,29.8 116.301,29.8 v3(117.317,29.8) v3(118.206,29.8) v3(119.095,29.8) v3(119.984,29.8) v3(120.873,29.8) v3(121.762,29.8) v3(122.651,29.8) D1.1@126.156,29.8 ; v3(142.186,35.439) v3(143.075,35.439) ; v3(155.013,35.439) v3(155.902,35.439) ; v3(156.791,35.439) v3(157.68,35.439)
  Bottom Layer w0.457: RF1.1@187.896,6.215 187.896,9.415
  Bottom Layer w1.016: RF1.1@187.896,6.215 187.896,4.14 189.827,2.21
  Bottom Layer w1.27: C28.2@111.125,15.779 111.125,13.31 115.691,8.744 125.572,8.744 127.121,7.194 CN2.5@127.121,5.721 CN2.4@124.581,5.721 124.581,8.591
  Bottom Layer w2.54: v3(140.408,35.439) v3(141.297,35.439) ; C8.2@168.927,45.345 168.927,42.774 168.25,42.097 v1(177.627,42.097) v1(178.516,42.097) v1(179.405,42.097)
  other v1: 106.616,0.601 111.696,0.601 114.236,0.601 116.776,0.601 119.316,0.601 121.856,0.601 124.396,0.601 126.936,0.601 129.476,0.601 132.016,0.601 134.556,0.601 137.096,0.601 139.636,0.601 142.176,0.601 144.716,0.601 147.256,0.601 149.796,0.601 152.336,0.601 154.876,0.601 157.416,0.601 159.956,0.601 162.496,0.601 165.036,0.601 167.576,0.601 170.116,0.601 172.656,0.601 175.196,0.601 177.736,0.601 180.276,0.601 182.816,0.601 185.356,0.601 187.896,0.601 188.963,2.436 104.795,2.749 186.296,3.579 184.137,3.706 189.471,4.468 149.593,4.722 151.625,4.722 171.183,4.722 172.961,4.722 164.833,4.976 149.593,6.246 189.598,6.881 164.833,7.008 181.343,7.516 151.785,8.032 153.657,8.024 157.213,8.024 169.151,8.024 171.386,8.024 173.723,8.024 186.55,8.024 105.143,8.278 160.261,8.278 166.179,8.481 107.741,9.658 181.343,10.056 184.137,10.056 188.963,10.056 186.423,10.437 105.143,10.818 181.343,12.596 184.137,12.596 188.963,12.596 186.55,12.723 167.119,13.18 168.973,13.206 105.143,13.358 162.681,15.119 181.343,15.136 184.137,15.136 188.963,15.136 157.424,15.17 186.55,15.263 105.143,15.898 105.143,18.438 168.643,18.438 171.183,20.216 178.803,20.216 105.143,20.978 168.643,20.978 111.297,21.52 120.416,22.053 113.228,22.129 176.263,22.756 105.143,23.518 185.153,23.772 156.592,24.523 158.363,25.508 113.228,25.685 105.143,26.058 136.011,26.066 133.548,26.117 115.412,26.422 146.019,26.524 140.914,27.057 132.049,27.641 188.963,27.836 183.375,27.963 105.143,28.598 181.724,28.598 154.274,28.86 158.897,29.165 131.922,30.029 188.963,30.376 160.093,30.613 105.143,31.138 127.071,31.807 128.899,31.832 188.963,32.916 153.817,33.001 130.754,33.102 132.227,33.178 161.023,33.424 162.293,33.424 105.143,33.678 183.629,33.926 127.756,34.245 147.086,34.245 164.579,35.202 151.371,35.439 105.143,36.218 125.902,37.573 176.517,37.996 183.883,37.996 188.963,37.996 137.942,38.055 135.986,38.182 105.143,38.758 149.085,38.758 173.825,39.164 152.895,39.266 164.833,39.52 136.113,40.011 141.551,40.265 156.156,40.265 124.073,40.417 183.883,40.536 188.963,40.536 159.499,40.79 177.627,41.208 178.516,41.208 179.405,41.208 180.294,41.208 181.183,41.208 182.072,41.208 182.961,41.208 141.551,41.281 156.156,41.281 105.143,41.298 166.865,41.298 175.026,41.433 150.101,41.552 183.883,41.679 136.113,42.068 152.895,42.06 181.183,42.097 182.072,42.097 182.961,42.097 161.277,42.568 137.662,42.678 183.883,42.7 177.627,42.986 178.516,42.986 179.405,42.986 180.294,42.986 181.183,42.986 182.072,42.986 182.961,42.986 188.963,43.076 168.135,43.33 171.056,43.711 105.143,43.838 114.269,44.227 136.385,44.219 137.909,44.219 118.714,44.38 141.555,44.392 159.829,45.133 191.503,45.616 105.143,46.378 170.929,47.648 160.327,47.673 194.043,48.156 167.5,48.41 114.294,48.698 119.476,48.85 105.143,48.918 135.961,50.044 194.043,50.696 105.143,51.458 129.433,51.949 114.287,51.966 194.043,53.236 133.123,53.702 125.394,54.438 114.287,55.268 194.043,55.776 194.043,58.316 126.512,58.68 118.605,59.332 177.152,59.459 123.616,59.569 108.699,59.586 180.581,59.586 184.645,59.84 188.328,59.967 194.043,60.856 122.067,62.592 194.043,63.396 194.043,65.936 115.303,66.698 112.763,69.238 115.303,69.238 117.843,69.238 120.383,69.238 122.923,69.238 125.463,69.238 128.003,69.238 130.543,69.238 133.083,69.238 135.623,69.238 138.163,69.238 140.703,69.238 143.243,69.238 145.783,69.238 148.323,69.238 150.863,69.238 153.403,69.238 155.943,69.238 158.483,69.238 161.023,69.238 163.563,69.238 166.103,69.238 168.643,69.238 171.183,69.238 173.723,69.238 176.263,69.238 178.803,69.238 181.343,69.238 183.883,69.238 186.423,69.238 188.963,69.238 191.503,69.238 194.043,69.238
  other v2: 119.609,9.119 121.813,9.302 122.93,9.353 125.343,9.404 126.41,9.429 148.686,12.274 147.924,12.401 149.473,14.23 148.711,17.888 152.648,18.853 150.21,19.259 148.737,19.793 153.766,19.869 152.293,20.428 130.449,20.885 153.741,21.342 148.762,21.494 151.531,21.723 153.791,22.841 148.737,22.891 145.613,24.238 139.821,24.923 137.231,24.949 130.931,25.101 155.366,25.457 130.169,26.701 141.32,28.708 137.764,28.784 145.994,29.089 139.059,31.197 146.121,32.924 151.709,33.204 147.899,33.458 159.964,33.61 145.409,33.915 139.161,34.093 137.891,34.321 149.931,34.601 161.132,34.626 145.409,34.728 160.014,34.753 139.085,34.855 137.967,35.236 165.831,35.541 145.282,35.566 160.04,35.642 138.602,35.871 139.313,35.871 152.953,36.023 160.141,36.506 145.308,36.582 137.713,36.785 138.78,36.811 149.854,37.014 163.951,37.395 185.668,37.496 152.445,37.75 165.374,38.335 151.074,38.665 185.414,39.122 166.085,39.452 187.396,39.605 169.158,40.748 170.53,41.129 187.573,42.805
  other v3: 117.317,28.911 118.206,28.911 119.095,28.911 119.984,28.911 120.873,28.911 121.762,28.911 122.651,28.911 117.317,30.689 118.206,30.689 119.095,30.689 119.984,30.689 120.873,30.689 121.762,30.689 122.651,30.689 140.408,34.55 141.297,34.55 142.186,34.55 143.075,34.55 143.964,34.55 155.013,34.55 155.902,34.55 156.791,34.55 157.68,34.55 158.569,34.55 143.964,35.439 158.569,35.439 140.408,36.328 141.297,36.328 142.186,36.328 143.075,36.328 143.964,36.328 155.013,36.328 155.902,36.328 156.791,36.328 157.68,36.328 158.569,36.328
H_RX: CN2.3 R55.1 | length 17.4
  Top Layer w0.305: CN2.3@121.911,5.727 122.118,5.934 122.118,7.162 122.531,7.575 127.833,7.575 129.788,9.531 129.788,13.874 131.719,15.805 R55.1@131.719,15.983
H_TX: C35.1 CN2.2 R54.1 | length 29
  Top Layer w0.305: CN2.2@119.371,5.727 119.578,5.934 119.578,7.677 120.213,8.312 127.68,8.312 129.23,9.861 129.23,15.17 130.931,16.872 135.961,16.872 137.281,15.551 R54.1@137.281,13.747
HOT: R34.1 U3.44 | length 17.4
  Top Layer w0.254: R34.1@135.986,27.641 R34.1@135.859,27.641 137.561,25.939 142.387,25.939 142.996,25.33 142.996,20.275 143.575,19.697 U3.44@146.863,19.697